# Altium PCB Distro_layout.PcbDoc
Units mil, origin at the board's own origin, x right, y up, seen from the top; angles counter-clockwise.
Board outline 1250 x 2300 mil, 2 copper layers (Top Layer, Bottom Layer); 9 components, 13 nets, 54 pads, 3 vias.
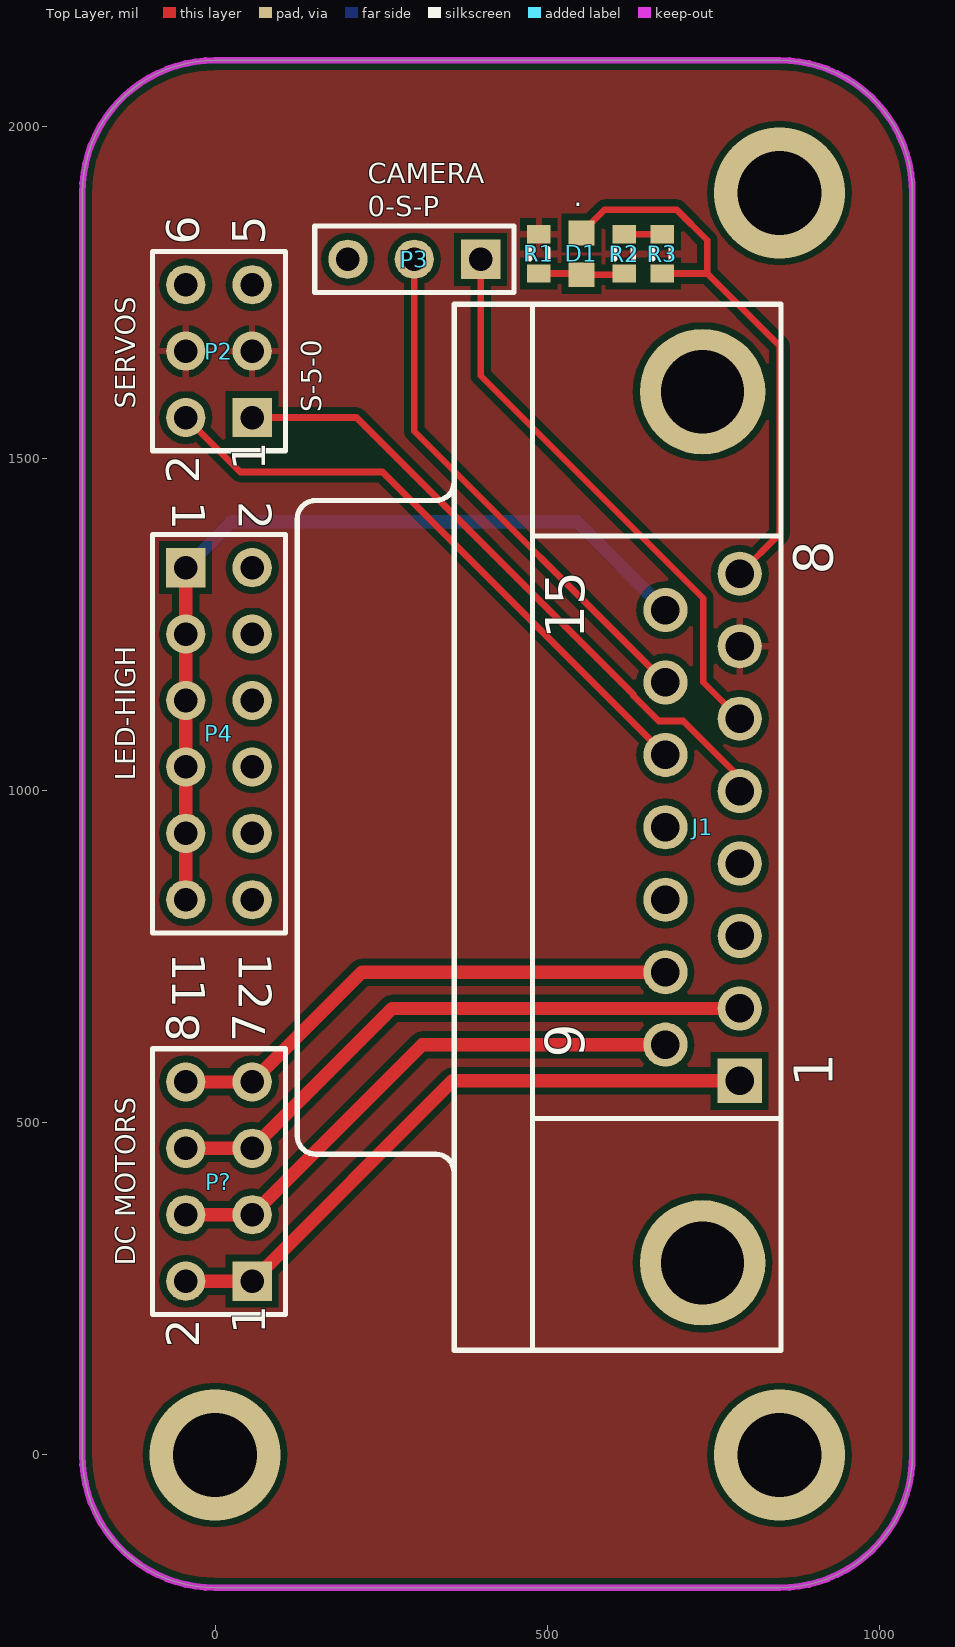
[diagram p0: Top Layer view]
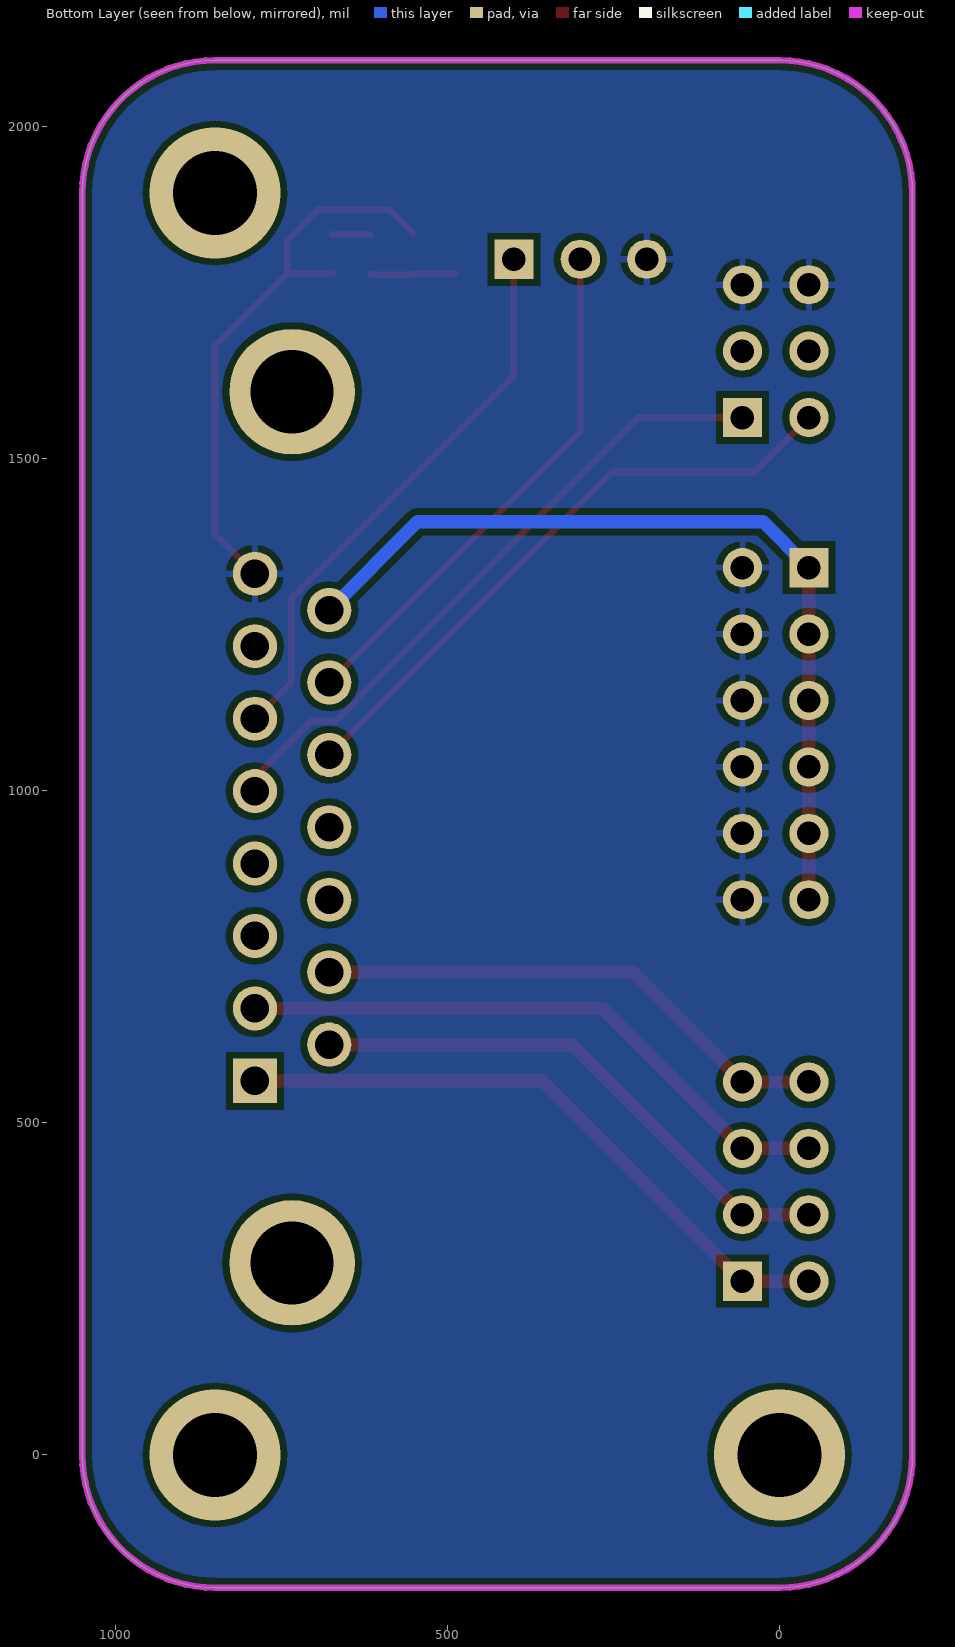
[diagram p1: Bottom Layer view, seen from below]

## Layer stack, top to bottom
Top Solder: solder mask 0.4, Solder Resist, Dk 3.5
Top Layer: signal copper 1.4
Dielectric 1: dielectric 12.6, FR-4, Dk 4.8
Bottom Layer: signal copper 1.4
Bottom Solder: solder mask 0.4, Solder Resist, Dk 3.5

## Board outline
-200,0 -200,1900 cw(c0,1900) 0,2100 850,2100 cw(c850,1900) 1050,1900 1050,0 cw(c850,0) 850,-200 0,-200 cw(c0,0)

## Design rules (kind name [scope] priority, off if disabled: settings)
Clearance [All] p1: gap=10
PolygonConnect [All] p1: connectstyle=Relief reliefconductorwidth=10 reliefentries=4 polygonreliefangle="90 Angle" airgapwidth=10
RoomDefinition Distro_schematic [InComponentClass('Distro_schematic')] p1: confinementstyle=ConfineIn formatcopy=TRUE lockcomponents=FALSE outline -200,-200 1050,-200 1050,2100 -200,2100
RoutingVias [All] p1: holewidth=28 width=50 viastyle="Through Hole" minholewidth=28 minwidth=50 maxholewidth=28 maxwidth=50
SolderMaskExpansion [All] p1: expansion=4
Width [All] p1: maxlimit=40 minlimit=10 preferedwidth=10
30 further rules are at their usual default settings.

## Components (designator, comment, footprint, x,y, rotation, side; value= is the part's Value field where it differs from the comment)
D1 "LED1" L0603 551.71,1808.36 r90 top
J1 "D Connector 15" DSUB1.385-2H15 360,945 r90 top
P2 "Header 3X2" HDR2X3 55.9,1561.98 r90 top
P3 "Header 3" HDR1X3 400,1800.29 r180 top
P4 "Header 6X2" HDR2X6 -44.1,1335.97 r270 top
P? "Header 4X2" HDR2X4 55.9,261.66 r90 top
R1 "Res3" J1-0603 487.57,1808.36 r270 top
R2 "Res3" J1-0603 615.86,1808.36 r90 top
R3 "Res3" J1-0603 673.11,1808.36 r270 top

## Footprints (in the part's own frame and the unit in brackets; to place one, negate y for a bottom-side part, rotate by r counter-clockwise, add the part's x,y. Pads: shape width x height; smd on the part's side, far side on the other; paste and mask are expansions set on the pad)
DSUB1.385-2H15 [mm] "Connector; D Subminiature; 15 Position; Right Angle; Pitch 1.385 mm"
  rect 1.69x1.69 hole 1.09: 1(-9.695,-10.92)
  round 1.69 hole 1.09: 2(-6.925,-10.92) 3(-4.155,-10.92) 4(-1.385,-10.92) 5(1.385,-10.92) 6(4.155,-10.92) 7(6.925,-10.92) 8(9.695,-10.92) 9(-8.31,-8.08) 10(-5.54,-8.08) 11(-2.77,-8.08) 12(0,-8.08) 13(2.77,-8.08) 14(5.54,-8.08) 15(8.31,-8.08)
  round 4.8 hole 3.18: 16(-16.66,-9.5) 17(16.66,-9.5)
  silkscreen extent -20,-12.5 20,6
HDR1X3 [mm] "Connector; Header; 3 Position"
  rect 1.5x1.5 hole 0.9: 1(0,0)
  round 1.5 hole 0.9: 2(2.54,0) 3(5.08,0)
  silkscreen extent -1.27,-1.27 6.35,1.27
HDR2X3 [mm] "Connector; Header; 3x2 Position"
  rect 1.5x1.5 hole 0.9: 1(0,0)
  round 1.5 hole 0.9: 2(0,2.54) 3(2.54,0) 4(2.54,2.54) 5(5.08,0) 6(5.08,2.54)
  silkscreen extent -1.27,-1.27 6.35,3.81
HDR2X4 [mm] "Connector; Header; 4x2 Position"
  rect 1.5x1.5 hole 0.9: 1(0,0)
  round 1.5 hole 0.9: 2(0,2.54) 3(2.54,0) 4(2.54,2.54) 5(5.08,0) 6(5.08,2.54) 7(7.62,0) 8(7.62,2.54)
  silkscreen extent -1.27,-1.27 8.89,3.81
HDR2X6 [mm] "Connector; Header; 6x2 Position"
  rect 1.5x1.5 hole 0.9: 1(0,0)
  round 1.5 hole 0.9: 2(0,2.54) 3(2.54,0) 4(2.54,2.54) 5(5.08,0) 6(5.08,2.54) 7(7.62,0) 8(7.62,2.54) 9(10.16,0) 10(10.16,2.54) 11(12.7,0) 12(12.7,2.54)
  silkscreen extent -1.27,-1.27 13.97,3.81
J1-0603 [mm] "Chip Resistor, Body 1.6x0.8mm, IPC High Density"
  rect 0.7x0.9 smd: 1(-0.75,0) 2(0.75,0)
  silkscreen extent -0.2,-0.35 0.2,0.35, body extent -0.85,-0.48 0.85,0.48, height 0.9
L0603 [mm]
  rect 0.95x1 smd: 1(-0.8,0) 2(0.8,0)

## Part data
D1: "Typical RED GaAs LED"
J1: "Receptacle Assembly, 15 Position, Right Angle"
P2: "Header, 3-Pin, Dual row"
P3: "Header, 3-Pin"
P4: "Header, 6-Pin, Dual row"
P?: "Header, 4-Pin, Dual row"
R1 R2 R3: "Resistor"

## Via types
v1: diameter 196.85, hole 125.98, Top Layer to Bottom Layer, 3 vias

## Nets (pads, with @x,y where several pads share a name; then routed paths per layer and width w, separated by ;. In a path a pad name is that pad's centre, name@x,y a point inside that pad or via, vN(x,y) a via of type N, cw(c..) or ccw(c..) an arc to the next point about the centre after c; other vN are vias at no path point)
BAT: J1.15 P4.1 P4.3 P4.5 P4.7 P4.9 P4.11 | length 1305.8
  Top Layer w20: P4.11 P4.9 P4.7 P4.5 P4.3 P4.1
  Bottom Layer w20: P4.1 24.93,1405 545.28,1405 J1.15
CAM_POW: J1.6 P3.1 | length 853.2
  Top Layer w10: P3.1 400,1625 735,1290 735,1163.5 J1.6
CAM_SIG: J1.14 P3.2 | length 793.8
  Top Layer w10: P3.2 300,1541.22 J1.14
GND: D1.2 J1.8 P2.5 P2.6 P3.3 P4.2 P4.4 P4.6 P4.8 P4.10 P4.12 R3.2 | length 863.3
  Top Layer w10: D1.2 586.86,1875 695,1875 741.17,1828.83 741.17,1778.83 ; R3.2 741.17,1778.83 ; J1.8 850,1386.77 850,1670 741.17,1778.83
MOTOR_1A: J1.1 P?.1 P?.2 | length 959
  Top Layer w20: P?.2 P?.1 357.54,563.31 J1.1
MOTOR_1B: J1.9 P?.3 P?.4 | length 828.3
  Top Layer w20: P?.4 P?.3 312.07,617.84 J1.9
MOTOR_2A: J1.2 P?.5 P?.6 | length 921.3
  Top Layer w20: P?.6 P?.5 266.6,672.36 J1.2
MOTOR_2B: J1.10 P?.7 P?.8 | length 790.7
  Top Layer w20: P?.8 P?.7 221.12,726.89 J1.10
NetR2_2: R2.2 R3.1 | length 57.3
  Top Layer w10: R2.2 R3.1
POWER: D1.1 R1.2 R2.1 | length 129.9
  Top Layer w10: R1.2 549.74,1778.83 D1.1 613.89,1776.86 R2.1
"PWM SV 1": J1.5 P2.1 | length 980.2
  Top Layer w10: P2.1 213.02,1561.98 629.84,1145.16 629.84,1143.12 667.96,1105 705,1105 789.92,1020.08 J1.5
"PWM SV 2": J1.13 P2.2 | length 932.6
  Top Layer w10: P2.2 37.88,1480 252.17,1480 J1.13
VCC: J1.7 P2.3 P2.4 R1.1
pads on no net: J1.3 J1.4 J1.11 J1.12 J1.16 J1.17
copper on no net:
  other v1: 0,0 850,0 850,1900

## Polygon pours and split planes (outlines as drawn)
GND on Bottom Layer "GND_L02_P000" (solid, remove dead copper, pour order 0): -200,0 -200,1900 cw(c0,1900) 0,2100 850,2100 cw(c850,1900) 1050,1900 1050,0 cw(c850,0) 850,-200 0,-200 cw(c0,0)
VCC on Top Layer "VCC_L01_P001" (solid, remove dead copper, pour order 1): -200,0 -200,1900 cw(c0,1900) 0,2100 850,2100 cw(c850,1900) 1050,1900 1050,0 cw(c850,0) 850,-200 0,-200 cw(c0,0)

## Keep-outs
Keep-Out Layer:
  the board outline again, w10

## Silkscreen, mask and mechanical layers (free items; w line width, h text height)
Top Overlay:
  text "CAMERA" at 230,1915 h30
  text "." at 540,1880 h30
  text "0-S-P" at 230,1865 h30
  text "SERVOS" at -120,1575 h30 r90
  text "S-5-0" at 160,1570 h30 r90
  text "LED-HIGH" at -120,1015 h30 r90
  text "DC MOTORS" at -120,285 h30 r90

## Text inside footprints (layer, text, board x,y; h text height)
J1: Top Overlay "9" at 555.87,598.15 h59.06 r90; Top Overlay "15" at 555.87,1227.87 h59.06 r90; Top Overlay "8" at 929.88,1325 h59.06 r90; Top Overlay "1" at 929.88,553.46 h59.06 r90
P2: Top Overlay "6" at -24.1,1821.98 h50 r90; Top Overlay "5" at 75.9,1821.98 h50 r90; Top Overlay "2" at -24.1,1461.98 h50 r90; Top Overlay "1" at 75.9,1481.98 h50 r90
P4: Top Overlay "12" at 35.9,755.97 h50 r270; Top Overlay "1" at -64.1,715.97 h50 r270; Top Overlay "1" at -64.1,755.97 h50 r270; Top Overlay "1" at -64.1,1435.97 h50 r270; Top Overlay "2" at 35.9,1435.97 h50 r270
P?: Top Overlay "2" at -24.1,161.66 h50 r90; Top Overlay "1" at 75.9,181.66 h50 r90; Top Overlay "7" at 75.9,621.66 h50 r90; Top Overlay "8" at -24.1,621.66 h50 r90